# EAGLE board dc_controller_2 (EAGLE 4.16)
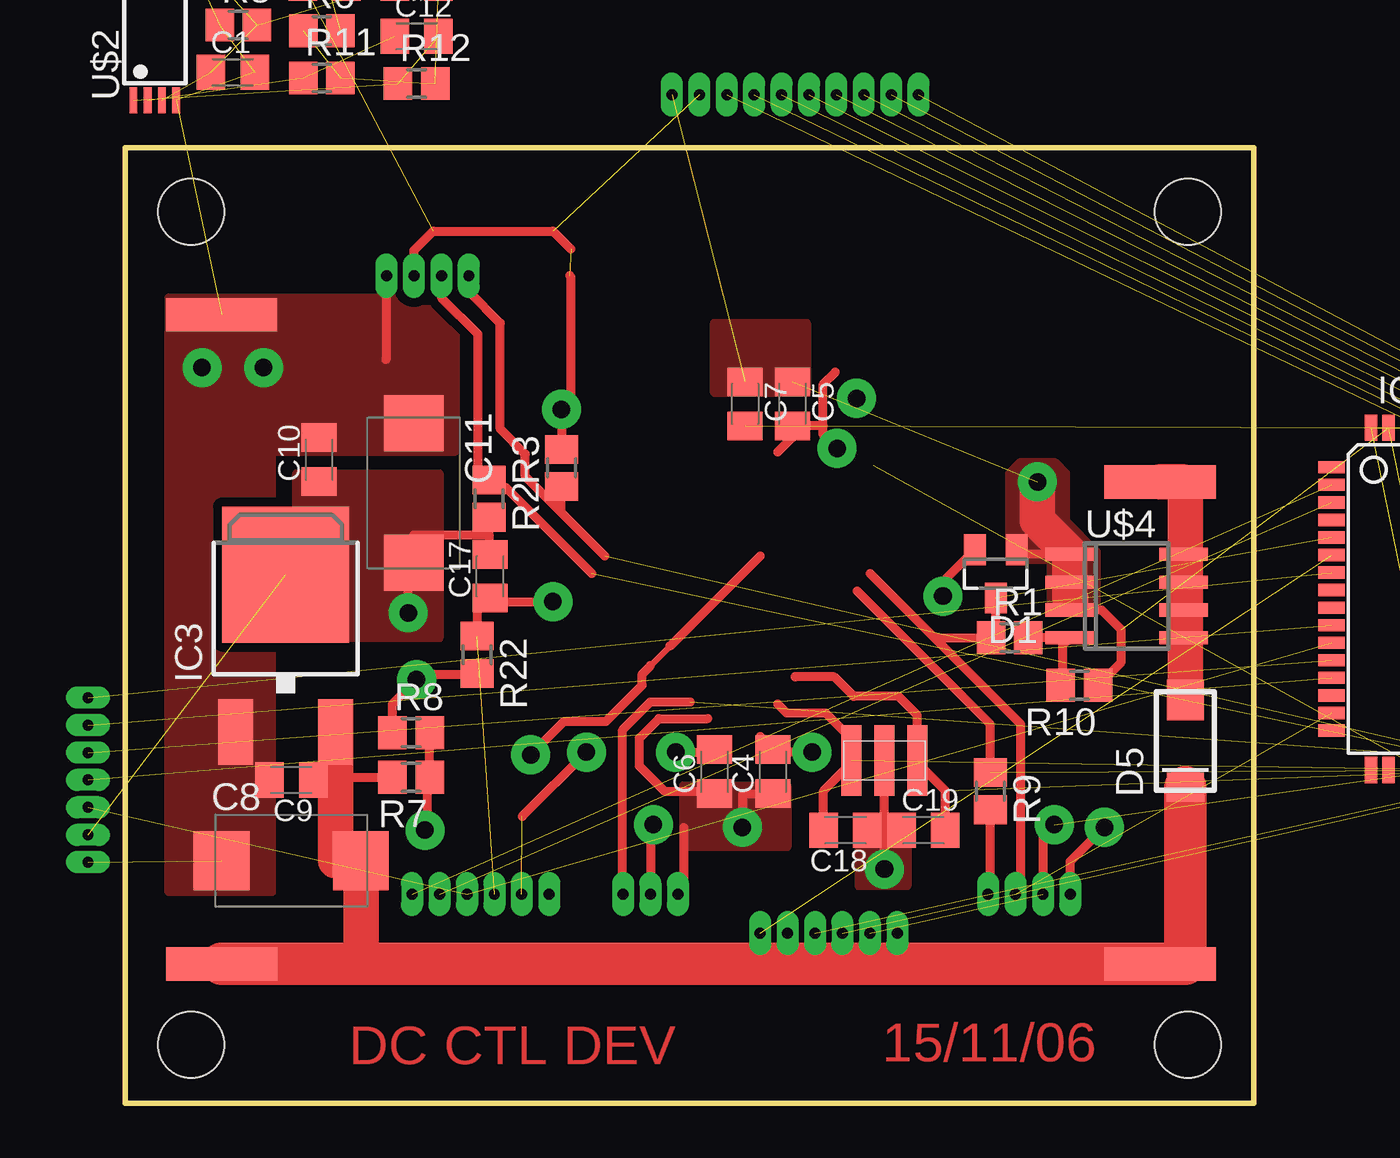
[diagram p0: board, top side]
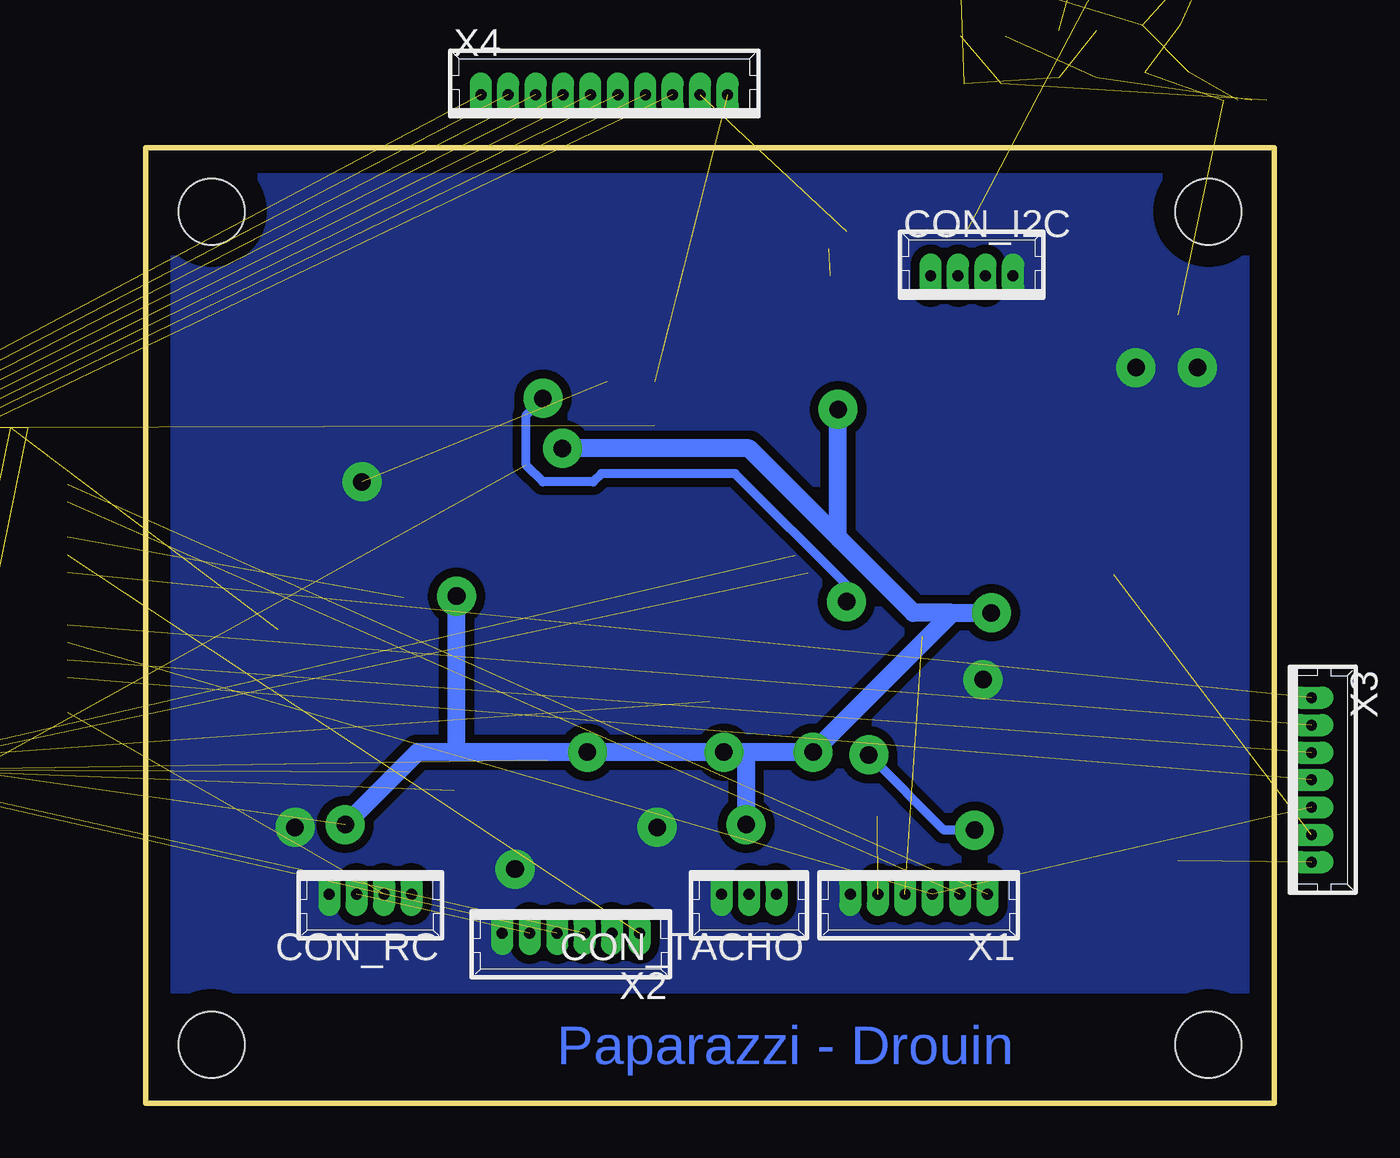
[diagram p1: board, bottom side, seen from below]

Size 51.49 x 43.55 mm. Coordinates in mm from the lower left corner, seen from the top.
Outline: 0,0 51.49,0 51.49,43.55 0,43.55 0,0
Copper layers (1*16): Top 0.035mm / dielectric 1.5mm / Bottom 0.035mm
Design rules "default": minimum track width 10mil, minimum drill 24mil, track to track 8mil, track to pad 8mil, pad to pad 8mil, via to via 8mil, smd to smd 8mil, copper to edge 40mil, drill to drill 8mil, minimum pad ring 10mil, minimum via ring 8mil, stop-mask expansion 4mil, vias tented up to drill 0mil, thermal gap 10mil
Holes 3 mm at 3.01,2.66 48.48,40.63 48.48,2.66 3.01,40.63

## Footprints (pad centres in the part's own frame; a part is rotated, then mirrored left to right if it is on the bottom)
C0805K = smd 1.3 x 1.6: 1 -1,0; 2 1,0
D/7343-31R = smd 2.55 x 2.7: + 3.175,0; - -3.175,0
53047-04 = drill 0.5 pad 0.698 long: 1 1.875,0; 2 0.625,0; 3 -0.625,0; 4 -1.875,0
53047-03 = drill 0.5 pad 0.698 long: 1 1.25,0; 2 0,0; 3 -1.25,0
SOT23 = smd 1 x 1.4: 1 -0.95,-1.1; 2 0.95,-1.1; 3 0,1.1
DO-214BA = smd 1.85 x 1.68: A 1.87,0 | smd 1.32 x 1.68: C -2.12,0
SOLDER_PAD_200_50 = smd 5.08 x 1.524: P$1 0,0
TQFP64 = smd 1.194 x 0.559: 1 -7.8,6; 2 -7.8,5.2; 3 -7.8,4.4; 4 -7.8,3.6; 5 -7.8,2.8; 6 -7.8,2; 7 -7.8,1.2; 8 -7.8,0.4; 9 -7.8,-0.4; 10 -7.8,-1.2; 11 -7.8,-2; 12 -7.8,-2.8; 13 -7.8,-3.6; 14 -7.8,-4.4; 15 -7.8,-5.2; 16 -7.8,-6; 33 7.8,-6; 34 7.8,-5.2; 35 7.8,-4.4; 36 7.8,-3.6; 37 7.8,-2.8; 38 7.8,-2; 39 7.8,-1.2; 40 7.8,-0.4; 41 7.8,0.4; 42 7.8,1.2; 43 7.8,2; 44 7.8,2.8; 45 7.8,3.6; 46 7.8,4.4; 47 7.8,5.2; 48 7.8,6 | smd 0.559 x 1.194: 17 -6,-7.8; 18 -5.2,-7.8; 19 -4.4,-7.8; 20 -3.6,-7.8; 21 -2.8,-7.8; 22 -2,-7.8; 23 -1.2,-7.8; 24 -0.4,-7.8; 25 0.4,-7.8; 26 1.2,-7.8; 27 2,-7.8; 28 2.8,-7.8; 29 3.6,-7.8; 30 4.4,-7.8; 31 5.2,-7.8; 32 6,-7.8; 49 6,7.8; 50 5.2,7.8; 51 4.4,7.8; 52 3.6,7.8; 53 2.8,7.8; 54 2,7.8; 55 1.2,7.8; 56 0.4,7.8; 57 -0.4,7.8; 58 -1.2,7.8; 59 -2,7.8; 60 -2.8,7.8; 61 -3.6,7.8; 62 -4.4,7.8; 63 -5.2,7.8; 64 -6,7.8
DPACK = smd 1.6 x 3: 1 -2.28,-4.8; 3 2.28,-4.8 | smd 5.8 x 6.2: 4 0,2.38
R0805 = smd 1.3 x 1.5: 1 -0.85,0; 2 0.85,0
SS495 = drill 0.61 round: 1 -1.27,0; 2 0,0; 3 1.27,0
TSSOP8 = smd 0.35 x 1.2: 1 -0.975,-2.925; 2 -0.325,-2.925; 3 0.325,-2.925; 4 0.975,-2.925; 5 0.975,2.925; 6 0.325,2.925; 7 -0.325,2.925; 8 -0.975,2.925
SO08 = smd 0.6 x 2.2: 1 -1.905,-2.6; 2 -0.635,-2.6; 3 0.635,-2.6; 4 1.905,-2.6; 5 1.905,2.6; 6 0.635,2.6; 7 -0.635,2.6; 8 -1.905,2.6
MICRO_CRYSTAL = smd 0.9 x 3.2: P$1 -1.5,0; P$2 0,0; P$3 1.5,0
53047-06 = drill 0.5 pad 0.698 long: 1 3.125,0; 2 1.875,0; 3 0.625,0; 4 -0.625,0; 5 -1.875,0; 6 -3.125,0
53047-07 = drill 0.5 pad 0.698 long: 1 3.75,0; 2 2.5,0; 3 1.25,0; 4 0,0; 5 -1.25,0; 6 -2.5,0; 7 -3.75,0
53047-10 = drill 0.5 pad 0.698 long: 1 5.625,0; 2 4.375,0; 3 3.125,0; 4 1.875,0; 5 0.625,0; 6 -0.625,0; 7 -1.875,0; 8 -3.125,0; 9 -4.375,0; 10 -5.625,0

## Placement (x,y rotation side)
C1  100nF  [C0805K]  4.92,46.98 0 top  (outside the outline)
C2  100nF  [C0805K]  9.11,51.05 0 top  (outside the outline)
C3  100nF  [C0805K]  13.3,51.05 0 top  (outside the outline)
C4  [C0805K]  29.55,15.11 90 top
C5  100nF  [C0805K]  30.44,31.87 270 top
C6  [C0805K]  26.89,15.11 90 top
C7  100nF  [C0805K]  28.28,31.87 270 top
C8  22uF  [D/7343-31R]  7.58,11.04 0 top
C9  100nF  [C0805K]  7.58,14.73 180 top
C10  100nF  [C0805K]  8.85,29.33 90 top
C11  22uF  [D/7343-31R]  13.17,27.81 270 top
C12  100nF  [C0805K]  13.3,48.64 0 top  (outside the outline)
C13  100nF  [C0805K]  1.23,53.72 0 top  (outside the outline)
C17  100nF  [C0805K]  16.64,24.01 90 top
C18  22pF  [C0805K]  32.85,12.44 180 top
C19  22pF  [C0805K]  36.41,12.44 0 top
CON_I2C  [53047-04]  13.8,37.71 0 bottom
CON_RC  [53047-04]  41.24,9.52 180 bottom
CON_TACHO  [53047-03]  23.96,9.52 180 bottom
D1  BAV199  [SOT23]  39.71,24.12 180 top
D5  [DO-214BA]  48.35,16.5 90 top
GND_IN  SOLDER_PAD200_50  [SOLDER_PAD_200_50]  4.41,35.94 180 top
IC1  MEGA128-A  [TQFP64]  62.83,22.98 0 top  (outside the outline)
IC3  LM317MABDT  [DPACK]  7.33,21.71 0 top
MOT+  SOLDER_PAD200_50  [SOLDER_PAD_200_50]  4.41,6.34 0 top
MOT-  SOLDER_PAD200_50  [SOLDER_PAD_200_50]  47.21,28.32 180 top
R1  100R  [R0805]  40.35,21.2 0 top
R2  10K  [R0805]  16.6,27.55 270 top
R3  10K  [R0805]  19.9,28.95 90 top
R4  10K  [R0805]  5.04,51.18 0 top  (outside the outline)
R5  10K  [R0805]  5.17,49.14 0 top  (outside the outline)
R6  120K  [R0805]  8.98,48.89 0 top  (outside the outline)
R7  10K  [R0805]  13.04,14.85 180 top
R8  10K  [R0805]  13.04,16.89 0 top
R9  100R  [R0805]  39.46,14.22 270 top
R10  10K  [R0805]  43.52,19.05 180 top
R11  390K  [R0805]  8.98,46.73 0 top  (outside the outline)
R12  470K  [R0805]  13.3,46.48 0 top
R22  1K  [R0805]  16.05,20.43 270 top
U$1  SS495  [SS495]  7.2,53.84 0 top  (outside the outline)
U$2  AD8552RU  [TSSOP8]  1.36,48.64 0 top
U$4  IRF7809  [SO08]  45.68,23.11 270 top
U$9  MICRO_RESO  [MICRO_CRYSTAL]  34.63,15.62 180 top
VBAT_IN  SOLDER_PAD200_50  [SOLDER_PAD_200_50]  47.21,6.34 0 top
X1  [53047-06]  16.22,9.52 180 bottom
X2  [53047-06]  32.09,7.74 180 bottom
X3  [53047-07]  -1.69,14.73 270 bottom
X4  [53047-10]  30.57,45.97 0 bottom

## Library data of the parts
C1-C13 C17-C19 R1-R12 R22 = rcl
CON_I2C CON_RC CON_TACHO X1-X4 = con-molex
D1 D5 = diode
GND_IN MOT+ MOT- U$1 U$2 U$4 U$9 VBAT_IN = paparazzi
IC1 = atmel
IC3 = v-reg

## Nets
+5V: C2.1 C4.2 C5.2 C6.2 C10.1 C11.+ C13.1 C17.2 CON_I2C.2 CON_RC.2 CON_TACHO.2 D1.2 IC1.21 IC1.52 IC1.64 IC3.4 R2.2 R3.2 R4.2 U$1.1 U$2.8 X1.2 X2.2 X3.2 X4.2
ADC0: IC1.61 X4.3
ADC1: IC1.60 X4.4
ADC2: IC1.59 X4.5
ADC3: IC1.58 X4.6
ADC4: IC1.57 X4.7
ADC5: IC1.56 X4.8
ADC6: IC1.55 X4.9
ADC7: IC1.54 X4.10
CTS: X2.5
DRDY: IC1.7 X3.7
DTR: IC1.6 X2.6
GND: C1.2 C2.2 C4.1 C5.1 C6.1 C7.1 C8.- C9.2 C10.2 C11.- C13.2 C18.1 C19.1 CON_I2C.1 CON_RC.1 CON_TACHO.1 D1.1 GND_IN.P$1 IC1.22 IC1.53 IC1.63 IC3.1 R5.1 R8.1 R10.1 R22.2 U$1.2 U$2.4 U$4.1 U$4.2 U$4.3 U$9.P$2 X1.1 X2.1 X3.1 X4.1
MEAS_BAT: R7.1 R8.2
MEAS_CURRENT: C12.2 R12.1 U$2.1
MISO: IC1.13 X3.4
MOSI: IC1.12 X3.5
N$1: C19.2 IC1.24 U$9.P$1
N$2: C18.2 IC1.23 U$9.P$3
N$3: C7.2 IC1.62
N$4: R6.2 U$1.3
N$5: CON_RC.4 R9.2
N$6: C3.2 R6.1 R11.2 R12.2
N$7: C12.1 R11.1 U$2.2
N$9: R1.2 R10.2 U$4.4
N$13: D5.A MOT-.P$1 U$4.5 U$4.6 U$4.7 U$4.8
PPM_IN: IC1.29 R9.1
PPM_OUT: CON_RC.3 IC1.15
PWM: D1.3 IC1.5 R1.1
RESET: C17.1 IC1.20 R22.1 X1.3
RXD0: IC1.2 X1.6
RXD1: IC1.27 X2.4
SCK: IC1.11 X1.4 X3.3
SCL: CON_I2C.3 IC1.25 R2.1
SDA: CON_I2C.4 IC1.26 R3.1
SS: IC1.10 X3.6
TACH_1: CON_TACHO.3 IC1.32
TXD0: IC1.3 X1.5
TXD1: IC1.28 X2.3
VBAT: C8.+ C9.1 D5.C IC3.3 MOT+.P$1 R7.2 VBAT_IN.P$1
VCC/2: C1.1 C3.1 R4.1 R5.2 U$2.3

## Tracks (layer width: path | path; a pad name or v marks a point on that pad's centre or on a via)
+5V  (via drill 0.8 pad 1.78)  (13 unrouted)
  Top 0.406: 28.98,16.7 29.55,16.12 C4.2 29.66,16 v31.33,16 | 26.89,16 C6.2 | 26.89,16 27.38,16.49 | v25.11,16 26.89,16 | CON_TACHO.2 23.96,12.57 v24.09,12.7 | 18.11,13.07 v21.04,16 | 29.78,29.68 30.44,30.35 C5.2 | C5.2 30.44,30.98 | CON_RC.2 41.86,12.18 v42.38,12.7 | 32.4,33.32 31.84,32.76 31.84,30.86 | v12.92,22.35 12.92,25.52 | R3.2 v19.9,31.62 20.33,32.05 20.33,37.66 20.28,37.71 | C11.+ 13.17,25.9 16.6,25.9 | 16.6,25.9 R2.2 | C17.2 16.6,25.01 16.6,25.9 | CON_I2C.2 13.18,38.87 14.06,39.75 19.52,39.75 20.28,38.98 | 20.28,38.98 20.33,38.93 | D1.2 37.3,23.76 v37.3,23.11 | 31.84,30.86 31.84,30.47 v32.47,29.84 | C5.2 31.82,30.87 31.84,30.86 | 20.28,38.98 20.32,38.94
  Bottom 0.813: 24.09,16 v21.04,16 14.69,22.35 | 24.09,16 v25.11,16 v31.33,16 37.3,16 | 24.09,16 v24.09,12.7 | 37.3,16 39.08,16 v42.38,12.7 | 19.77,25.65 16.47,22.35 14.69,22.35 | 19.77,25.65 19.9,25.78 v19.9,31.62 | 14.69,22.35 v12.92,22.35 | 37.3,16 v37.3,23.11 | v32.47,29.84 23.96,29.84 19.77,25.65
  pour Top (isolate 0.406, no thermals): 4.92,26.92 7.84,26.92 7.84,28.7 14.31,28.7 14.31,21.2 4.66,21.2 4.66,26.92 5.04,26.92
ADC0  (1 unrouted)
ADC1  (1 unrouted)
ADC2  (1 unrouted)
ADC3  (1 unrouted)
ADC4  (1 unrouted)
ADC5  (1 unrouted)
ADC6  (1 unrouted)
ADC7  (1 unrouted)
DRDY  (1 unrouted)
DTR  (1 unrouted)
GND  (via drill 0.8 pad 1.78)  (12 unrouted)
  Top 0.406: 35.52,12.44 C19.1 34.63,12.44 | 34.63,12.44 C18.1 | 34.63,12.57 34.63,12.44 | 34.63,12.57 U$9.P$2 | C4.1 29.55,14.09 28.18,14.09 28.18,12.59 v28.16,12.57 | 26.57,17.52 24.35,17.52 23.46,16.63 23.46,15.36 24.6,14.22 26.89,14.22 C6.1 | CON_TACHO.1 25.49,9.79 25.49,12.57 | v34.63,10.66 34.63,12.57 | CON_RC.1 43.11,11.01 v44.67,12.57 | 43.14,22.98 42.89,22.73 42.89,22.47 U$4.3 44.54,22.47 45.43,21.59 45.43,20.1 R10.1 | 43.08,23.11 43.14,23.11 43.08,23.17 U$4.2 | 43.08,24.38 43.02,24.38 43.08,24.45 U$4.1 40.86,25.01 40.66,25.21 D1.1 | R8.1 12.19,18.2 v13.3,19.3 13.55,19.55 16.08,19.55 | 16.08,19.55 16.09,19.55 | 16.08,19.55 R22.2 | CON_I2C.1 11.93,33.93 11.9,33.9
  Top 1.626: 43.14,22.98 43.08,23.04 43.08,23.11 U$4.2 43.08,24.38 U$4.1 43.08,25.07 41.62,26.54 v41.62,28.32
  other vias: 3.52,33.52 6.31,33.52
  pour Top (no thermals): 30.19,14.47 30.19,11.68 25.49,11.68 25.49,14.47
  pour Top (no thermals): 33.49,12.95 35.65,12.95 35.65,9.9 33.49,9.9
  pour Top (no thermals): 26.89,35.55 31.08,35.55 31.08,32.38 26.89,32.38
  pour Bottom (isolate 0.406, no thermals): 0.34,43.17 51.27,43.17 51.27,5.2 0.34,5.2
  pour Top (isolate 0.406, no thermals): 1.99,9.65 6.69,9.65 6.69,29.71 15.07,29.71 15.07,36.7 1.99,36.7
  pour Top (no thermals): 40.35,24.76 40.35,28.7 40.86,29.2 42.38,29.2 42.89,28.7 42.89,26.54 44.28,25.14 44.28,22.47 42.25,22.47 42.25,24.76
MEAS_BAT  (via drill 0.8 pad 1.78)
  Top 0.254: 23.96,19.93 24.85,20.82
  Top 0.406: R8.2 13.93,16.89 13.89,16.85 R7.1 13.8,14.85 13.8,12.44 v13.68,12.44 | 24.85,20.82 28.98,24.94 | v18.5,15.87 20.03,17.39 21.93,17.39 23.58,19.05 23.58,19.55 23.96,19.93
  Bottom 0.406: v18.5,15.87 15.07,12.44 v13.68,12.44
MEAS_CURRENT  (2 unrouted)
MISO  (1 unrouted)
MOSI  (1 unrouted)
N$1  (1 unrouted)
  Top 0.406: C19.2 37.41,14.23 36.13,15.51 U$9.P$1 36.13,17.67 35.27,18.54 33.24,18.54 32.35,19.43 30.57,19.43 30.57,19.45
N$2  (1 unrouted)
  Top 0.406: 29.78,18.19 30.19,17.78 31.97,17.78 33.11,16.63 33.11,15.62 U$9.P$3 33.13,15.51 31.86,14.23 C18.2
N$3  (1 unrouted)
N$4  (1 unrouted)
N$5
  Top 0.406: 39.46,13.46 R9.2 39.46,9.62 CON_RC.4
N$6  (3 unrouted)
N$7  (2 unrouted)
N$9
  Top 0.406: R1.2 U$4.4 42.76,20.88 42.76,19.05 R10.2
N$13
  Top 0.406: 48.48,25.01 48.35,25.01 U$4.8 | 48.73,23.74 48.35,23.74 U$4.7 | 48.73,22.47 48.35,22.47 U$4.6 | 48.35,21.33 48.22,21.33 48.28,21.27 U$4.5
  Top 1.626: D5.A 48.35,21.33 48.35,22.47 48.35,23.74 48.35,25.01 48.35,28.19 48.22,28.32 MOT-.P$1
PPM_IN  (1 unrouted)
  Top 0.406: R9.1 39.46,17.27 33.38,23.34
PPM_OUT  (1 unrouted)
PWM  (1 unrouted)
  Top 0.406: D1.3 39.71,21.42 R1.1 37.05,21.2 36.98,21.14 | 40.86,9.76 40.86,17.27 39.59,18.54 | 39.59,18.54 39.6,18.53 | 39.59,18.54 36.98,21.14 | 36.98,21.14 33.98,24.14
RESET  (via drill 0.8 pad 1.78)  (2 unrouted)
  Top 0.406: 20.01,23.34 v19.52,22.86 16.8,22.86 C17.1 16.63,23.01 16.05,22.43 R22.1 | v33.36,32.13 33.65,32.41
  Bottom 0.406: v33.36,32.13 34.12,31.36 34.12,29.08 33.36,28.32 31.08,28.32 30.7,28.7 24.6,28.7 19.52,23.62 v19.52,22.86
RXD0  (1 unrouted)
RXD1  (1 unrouted)
SCK  (2 unrouted)
SCL  (1 unrouted)
  Top 0.406: CON_I2C.3 14.44,36.7 16.09,35.05 16.09,28.95 16.6,28.44 R2.1 16.6,28.06 17.36,28.06 21.28,24.14
SDA  (1 unrouted)
  Top 0.406: CON_I2C.4 15.71,37.71 15.71,36.95 17.11,35.55 17.11,30.73 18.25,29.59 18.25,28.57 19.9,26.92 | R3.1 19.86,28.06 19.86,26.96 19.9,26.92 | 19.9,26.92 21.88,24.94
SS  (1 unrouted)
TACH_1  (1 unrouted)
  Top 0.406: 25.78,18.28 23.96,18.28 22.7,17.01 22.7,9.54 CON_TACHO.3
TXD0  (1 unrouted)
TXD1  (1 unrouted)
VBAT
  Top 0.406: 9.74,14.09 9.61,14.73 C9.1 | 9.61,14.35 9.49,13.71 | 9.49,14.85 9.61,14.85 R7.2
  Top 1.626: 10.76,6.34 C8.+ 9.61,11.04 9.61,14.35 9.61,14.73 9.61,14.85 IC3.3 | IC3.3 9.61,17.01 | IC3.3
  Top 1.93: MOT+.P$1 10.76,6.34 VBAT_IN.P$1 48.35,6.34 D5.C
VCC/2  (4 unrouted)

## Text on the board
Top: DC CTL DEV | 15/11/06
Bottom: Paparazzi - Drouin